# Altium PCB PCB1.PcbDoc (part 2 of 2)
Units mm, origin at the board's own origin, x right, y up, seen from the top; angles counter-clockwise.
Board outline 17.5 x 24.5 mm, 4 copper layers (Top Layer, Signal Layer 1, Signal Layer 2, Bottom Layer), stack 0.778 mm thick; 72 components, 48 nets, 266 pads, 79 vias.
Unrouted connection lines stored in the file: 1.
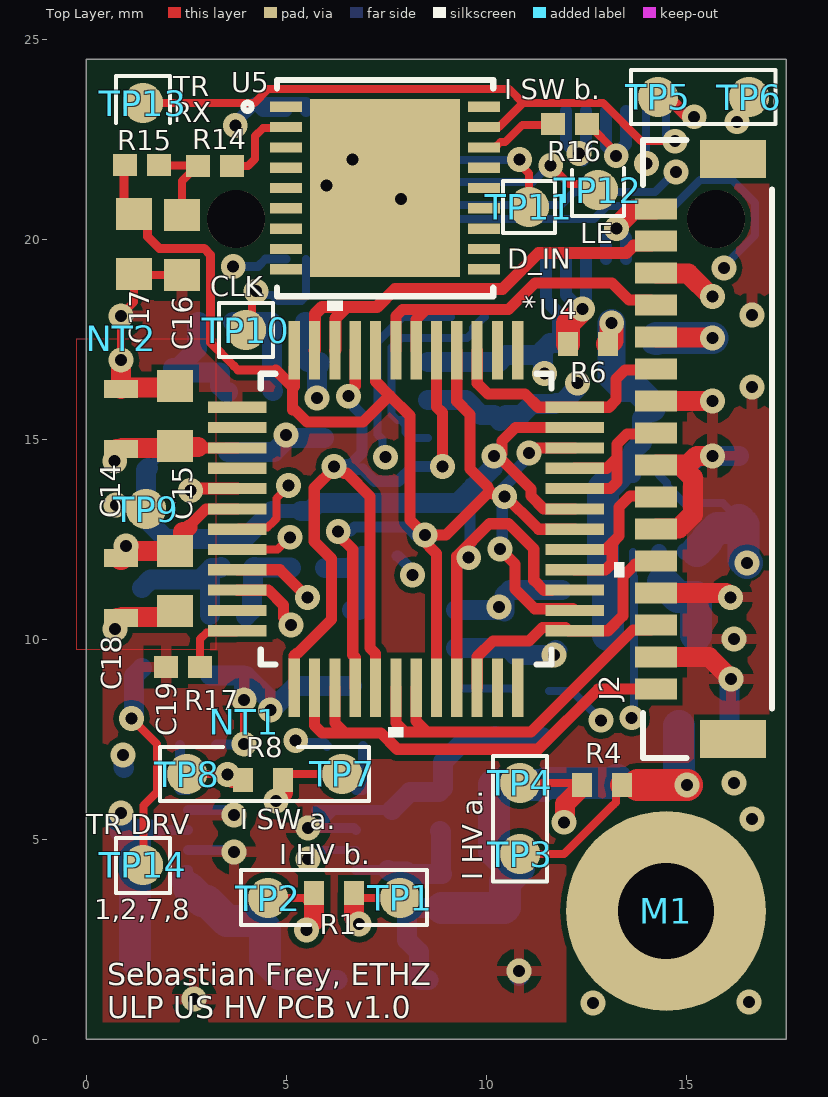
[diagram p0: Top Layer view]

## Via types
v1: diameter 0.62, hole 0.3, Top Layer to Bottom Layer, tented both sides, 79 vias

## Nets (pads, with @x,y where several pads share a name; then routed paths per layer and width w, separated by ;. In a path a pad name is that pad's centre, name@x,y a point inside that pad or via, vN(x,y) a via of type N, cw(c..) or ccw(c..) an arc to the next point about the centre after c; other vN are vias at no path point) (continued)
VCC_HV_REG_IN: (continued)
  Bottom Layer w0.8: C1.1@0.975,5.25 1.225,5 L1.1
VCC_HV_REG_OUT: C5.1 FB1.2 R4.1 TP3.1 | length 6.7
  Top Layer w0.2: TP3.1 11.95,4.625 13.175,5.85 13.183,5.85 13.25,5.917 13.25,6.2 R4.1
  Top Layer w0.6: R4.1 13.8,6.35
  Top Layer w0.8: 13.8,6.35 v1(15.025,6.35)
  Bottom Layer w0.8: C5.1 14.825,6.55 FB1.2@14.9,6.475 ; FB1.2 FB1.2@14.9,6.475 ; v1(15.025,6.35) FB1.2@14.9,6.475
VCC_SW: C14.2 C15.1 R8.2 TP8.1 U4.15 | length 14.3
  Top Layer w0.2: TP8.1 2.53,6.62 3.531,6.62 v1(3.536,6.615)
  Top Layer w0.28: 2.8,14.8 2.822,14.778 U4.15 ; v1(3.536,6.615) 3.601,6.55 3.633,6.55 3.85,6.55 3.875,6.525 R8.2
  Top Layer w0.5: v1(0.716,14.45) 0.739,14.473 0.739,14.725 0.764,14.75 C14.2 0.9,14.775 2.175,14.775 C15.1 2.25,14.8 2.8,14.8 ; v1(3.536,6.615) 3.568,6.615 3.633,6.55 3.659,6.525 3.875,6.525 3.925,6.525 R8.2
  Signal Layer 2 w0.5: v1(0.716,14.45) 2.126,13.04 2.126,8.025 v1(3.536,6.615)
VCC_SW_REG_IN: C8.1 L2.1 R6.2 TP6.1 U2.1 | length 17.7
  Top Layer w0.2: v1(16.275,22.93) 16.355,23.01 16.355,23.139 16.6,23.384 TP6.1@16.6,23.6
  Top Layer w0.6: R6.2 13.138,17.463 13.138,17.896 v1(13.142,17.9)
  Signal Layer 1 w0.2: v1(13.142,17.9) 13.142,17.942 14.775,19.575 14.775,20.904 16.195,22.323 16.195,22.85 v1(16.275,22.93)
  Bottom Layer w0.4: 13.275,14.1 13.675,14.1 U2.1 13.675,14.7 13.275,14.3 13.275,14.1
  Bottom Layer w0.5: 13.675,14.7 13.894,14.919 13.894,15.519 C8.1
  Bottom Layer w0.7: v1(13.142,17.9) 13.142,16.57 13.437,16.275 13.749,16.275 14.15,15.873 C8.1
  Bottom Layer w0.8: L2.1 13.05,11.284 12.925,11.409 12.925,13.75 13.275,14.1
VCC_SW_REG_OUT: C7.1 R8.1 TP7.1 U2.2 U2.4 | length 24
  Top Layer w0.2: R8.1 5.075,6.625 TP7.1
  Top Layer w0.5: v1(4.75,5.95) 4.75,5.982 4.925,6.157 R8.1
  Signal Layer 1 w0.8: v1(4.75,5.95) 5.389,6.589 13.864,6.589 15.15,7.875 15.15,11.431 15.619,11.9 v1(16.525,11.9)
  Bottom Layer w0.2: U2.2 14.325,14.1 14.525,13.9 14.525,13.826 14.951,13.4 15.919,13.4 16.325,12.994 C7.1
  Bottom Layer w0.4: U2.4 14.975,12.2 15.275,12.2
  Bottom Layer w0.8: 15.275,12.2 15.525,12.45 15.525,12.506 15.789,12.771 16.219,12.771 16.325,12.877 C7.1 16.431,12.869 16.431,11.994 v1(16.525,11.9)
VSYS_MCU: C18.2 C19.1 J1.02 J1.04 U4.18 | length 18.1
  Top Layer w0.28: 2.588,12.788 2.588,12.838 3.004,13.254 U4.18
  Top Layer w0.4: 2.425,12.675 2.475,12.675 2.588,12.788
  Top Layer w0.5: C18.2@1.2,12.2 C19.1 C19.1@2.25,12.2 ; C19.1@2.425,12.4 2.425,12.675
  Top Layer w0.6: C18.2 1,12.15 v1(1,12.325)
  Signal Layer 1 w0.8: v1@1.075,12.325 v1(1,12.325) 1.75,13.075 1.75,20.858 v1(3.732,22.84)
  Bottom Layer w0.3: v1(3.732,22.84) 3.732,22.908 4.223,23.4 ; J1.02 4.423,23.2 4.223,23.4 ; J1.04 5.5,23.4 4.223,23.4
pads on no net: J1. J1.06 J1.07 J1.08 J1.10 J1.11 J1.12 J1.14 J1.16 J1.17 J1.18 J1.19 J1.20 J1.21 J1.22 J1.23 J1.24 J1.25 J1.26 J1.28 J1.37 J1.39 J2.17 J2.18 U4.1 U4.2 U4.14 U4.16 U4.23 U4.35 U4.36 U5.1 U5.3 U5.4 U5.5 U5.6 U5.7 U5.8 U5.9 U5.10 U5.11 U5.12 U5.13 U5.14 U5.15 U5.18

## Polygon pours and split planes (outlines as drawn)
USS_GND on Top Layer "NONET_L-01_P-001" (solid, remove dead copper, pour order 11): -0.25,-0.25 17.75,-0.25 17.75,24.75 -0.25,24.75
HV_GND on Top Layer "NONET_L-01_P-001" (solid, remove dead copper, pour order 0): -0.25,-2 12,-2 12,7 5.5,7 5.5,8 -0.25,8
DIG_GND on Top Layer "NONET_L-01_P-001" (solid, remove dead copper, pour order 7): -0.25,9.75 3.25,9.75 3.25,17.5 -0.25,17.5
USS_GND on Signal Layer 1 "NONET_L-01_P-001" (solid, remove dead copper, pour order 12): -0.25,-0.25 17.75,-0.25 17.75,24.75 -0.25,24.75
HV_GND on Signal Layer 1 "NONET_L-01_P-001" (solid, remove dead copper, pour order 1): -0.25,-2 12,-2 12,7 5.5,7 5.5,8 -0.25,8
DIG_GND on Signal Layer 1 "NONET_L-01_P-001" (solid, remove dead copper, pour order 8): -0.25,9.75 3.25,9.75 3.25,17.5 -0.25,17.5
USS_GND on Signal Layer 2 "NONET_L-01_P-001" (solid, remove dead copper, pour order 13): -0.25,-0.25 17.75,-0.25 17.75,24.75 -0.25,24.75
HV_GND on Signal Layer 2 "NONET_L-01_P-001" (solid, remove dead copper, pour order 2): -0.25,-2 12,-2 12,7 5.5,7 5.5,8 -0.25,8
DIG_GND on Signal Layer 2 "NONET_L-01_P-001" (solid, remove dead copper, pour order 9): -0.25,9.75 3.25,9.75 3.25,17.5 -0.25,17.5
USS_GND on Bottom Layer "NONET_L-01_P-001" (solid, remove dead copper, pour order 14): -0.25,-0.25 17.75,-0.25 17.75,24.75 -0.25,24.75
HV_GND on Bottom Layer "NONET_L-01_P-001" (solid, remove dead copper, pour order 3): -0.25,-2 12,-2 12,7 5.5,7 5.5,8 -0.25,8
DIG_GND on Bottom Layer "NONET_L-01_P-001" (solid, remove dead copper, pour order 10): -0.25,9.75 3.25,9.75 3.25,17.5 -0.25,17.5

## Silkscreen, mask and mechanical layers (free items; w line width, h text height)
Top Overlay:
  lines w0.1: 0.75,22.9 0.75,24.075 2.1,24.075 2.1,22.9 ; 3.425,7.3 1.85,7.3 1.85,5.95 7.075,5.95 7.075,7.3 5.3,7.3 ; 3.875,4.2 3.875,2.85 5.6,2.85 ; 3.875,4.225 8.525,4.225 ; 6.8,2.85 8.525,2.85 8.525,4.2 ; 10.171,3.943 11.521,3.943 ; 10.175,3.95 10.175,7.075 11.525,7.075 11.525,3.95 ; 12.15,21.725 12.15,20.575 13.45,20.575 13.45,21.775 ; 17.225,22.875 13.625,22.875 13.625,24.225 17.225,24.225 ; 17.232,22.871 17.232,24.221 ; 0.75,3.65 0.75,5.025 2.1,5.025 2.1,3.65 0.75,3.65 ; 3.325,17.05 4.675,17.05 4.675,18.4 3.325,18.4 3.325,17.05 ; 10.425,20.15 10.425,21.45 11.725,21.45 11.725,20.15 10.425,20.15
  text "TR" at 2.175,23.575 h0.5
  text "I SW b." at 10.45,23.5 h0.5
  text "RX" at 2.175,22.925 h0.5
  text "LE" at 12.35,19.9 h0.5
  text "D_IN" at 10.525,19.258 h0.5
  text "CLK" at 3.1,18.575 h0.5
  text "I SW a." at 3.85,5.25 h0.5
  text "TR DRV" at 0,5.125 h0.5
  text "I HV b." at 4.825,4.375 h0.5
  text "I HV a." at 9.9,3.975 h0.5 r90
  text "1,2,7,8" at 0.2,2.992 h0.5
  text "Sebastian Frey, ETHZ / ULP US HV PCB v1.0" at 0.525,0.525 h0.55

## Text inside footprints (layer, text, board x,y; h text height)
D1: Bottom Overlay "*" at 9.82,0.84 h0.5; Bottom 3D Body "*" at 8.39,0.84 h1.27
U3: Bottom Overlay "*" at 8.825,17.25 h0.5; Bottom 3D Body "*" at 8.215,16.341 h1.27
U4: Top Overlay "*" at 10.725,18.6 h0.5 r270; Top 3D Body "*" at 10.413,16.442 h1.27 r270
U6: Bottom Overlay "*" at 9.6,11.15 h0.5; Bottom 3D Body "*" at 8.915,10.141 h1.27